# EAGLE board md (EAGLE 9.6.2)
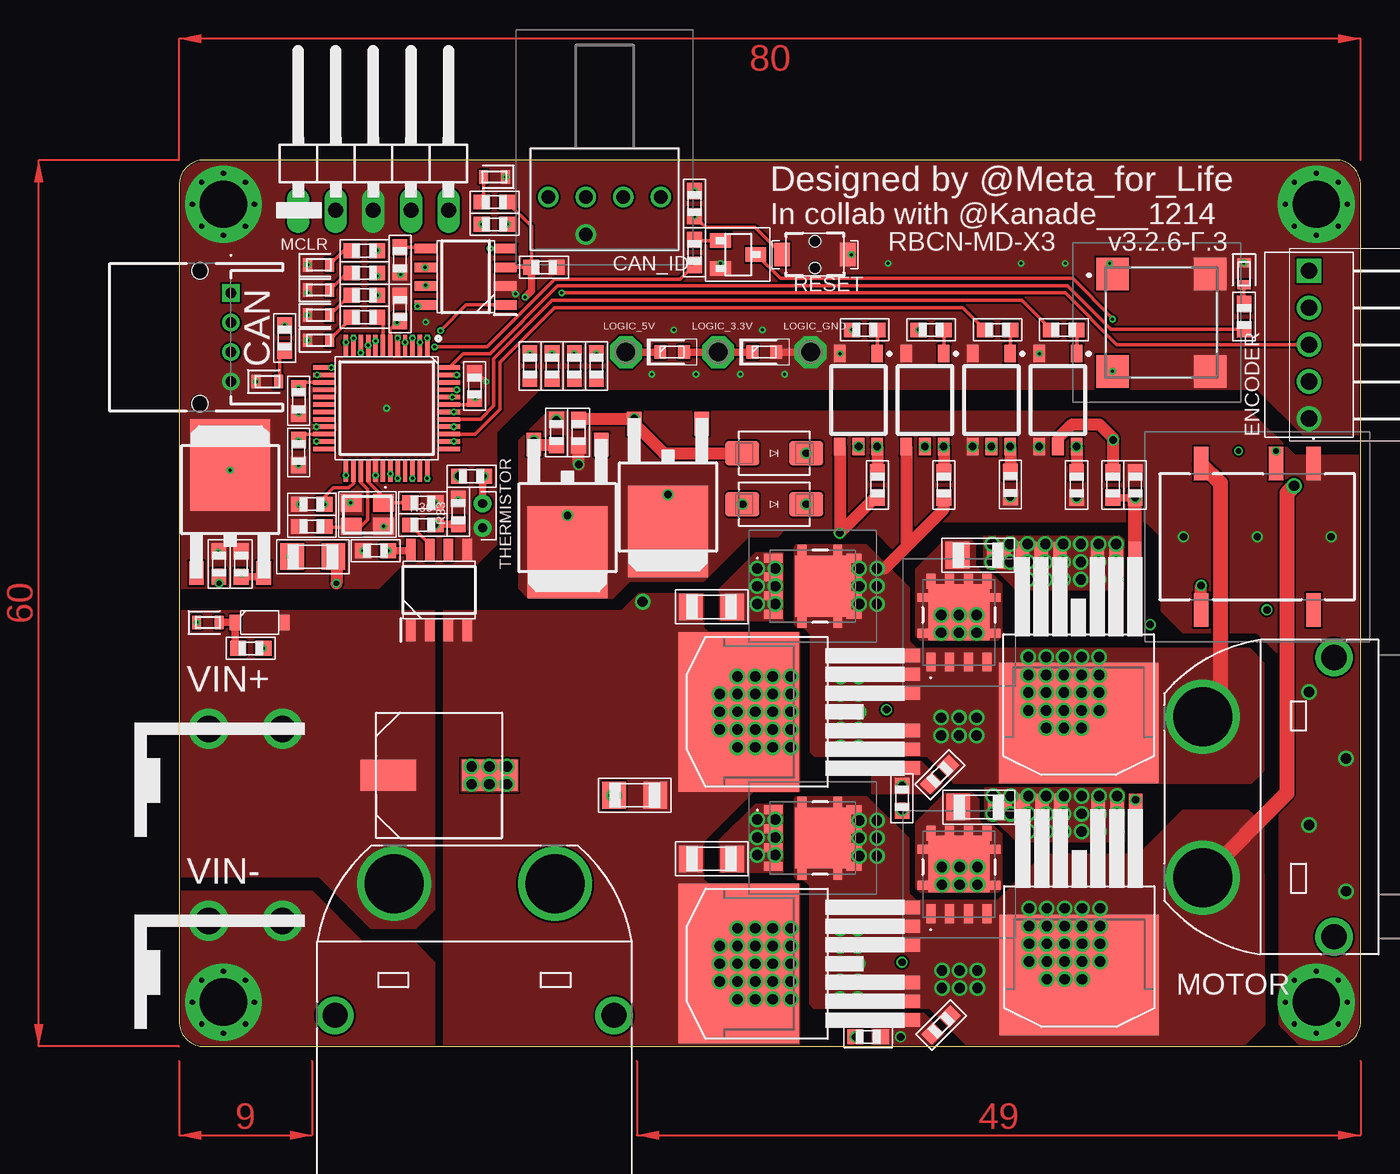
[diagram p0: board, top side]
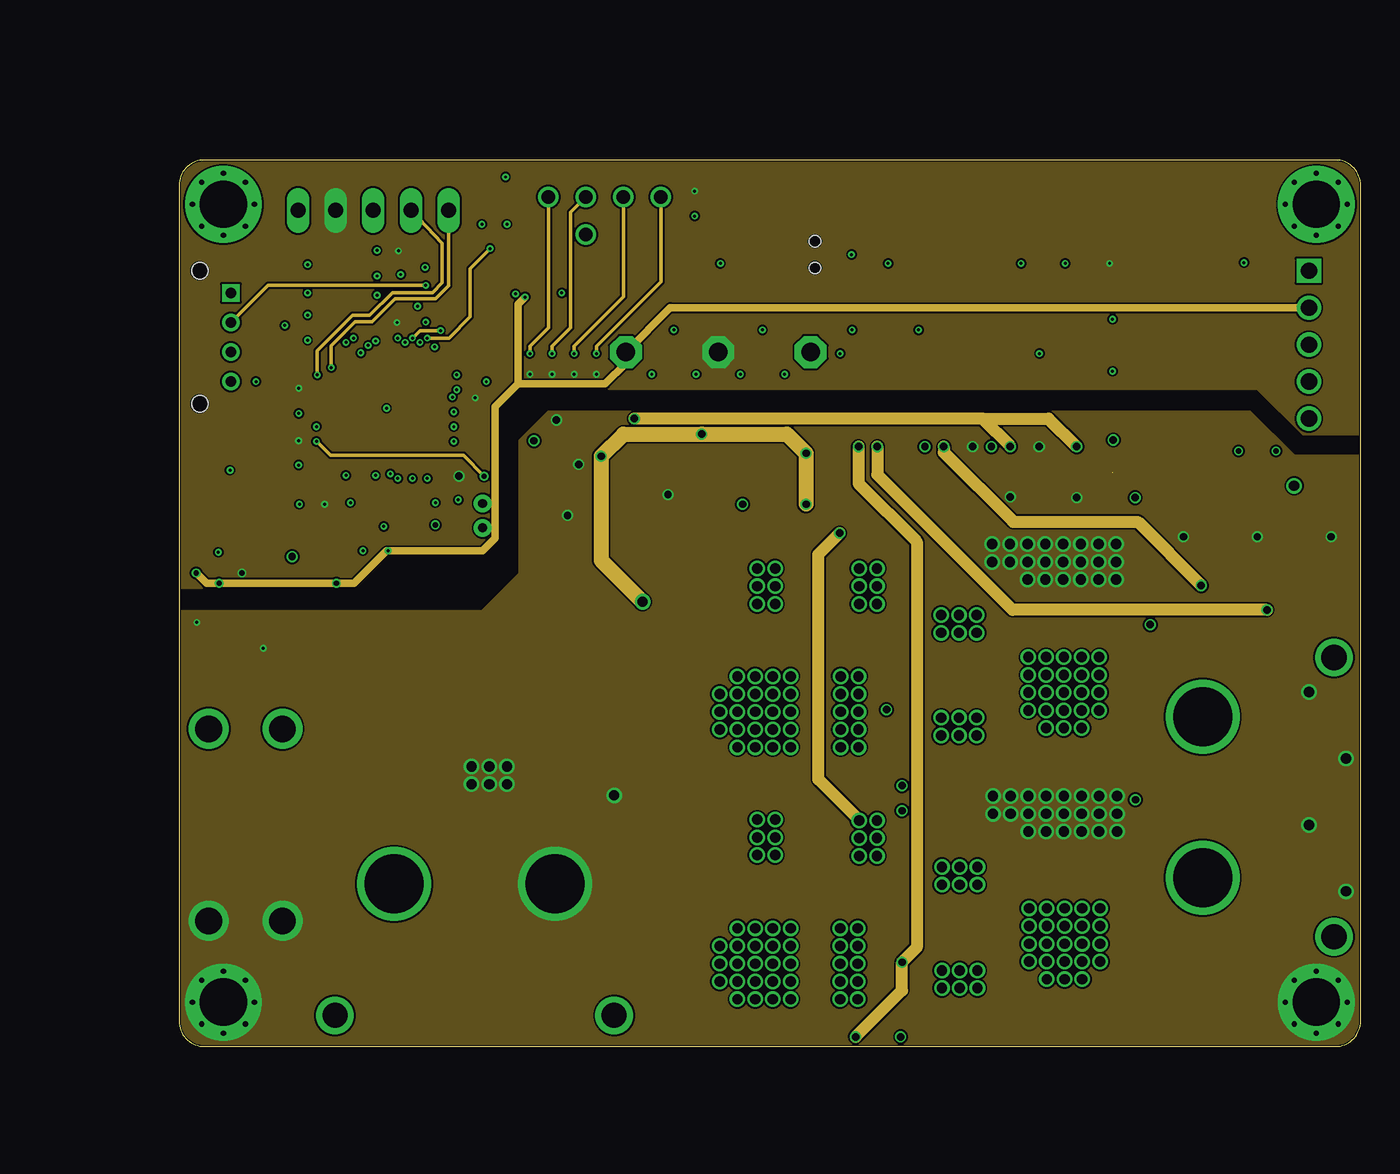
[diagram p1: board, inner layer Route2]
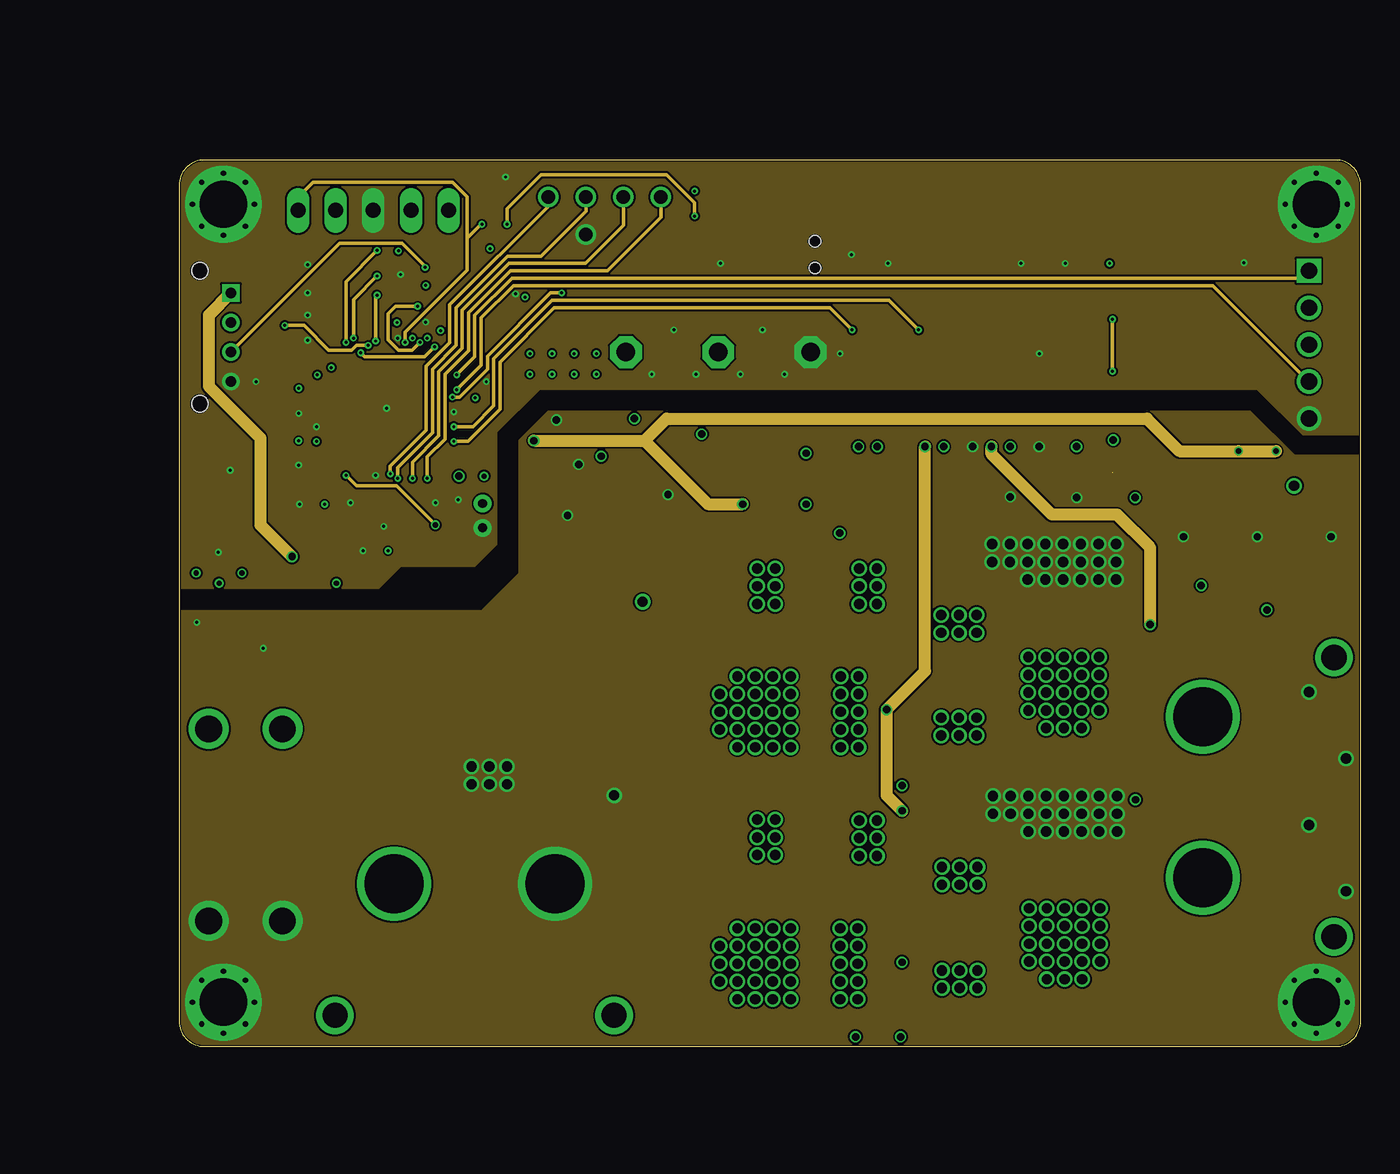
[diagram p2: board, inner layer Route15]
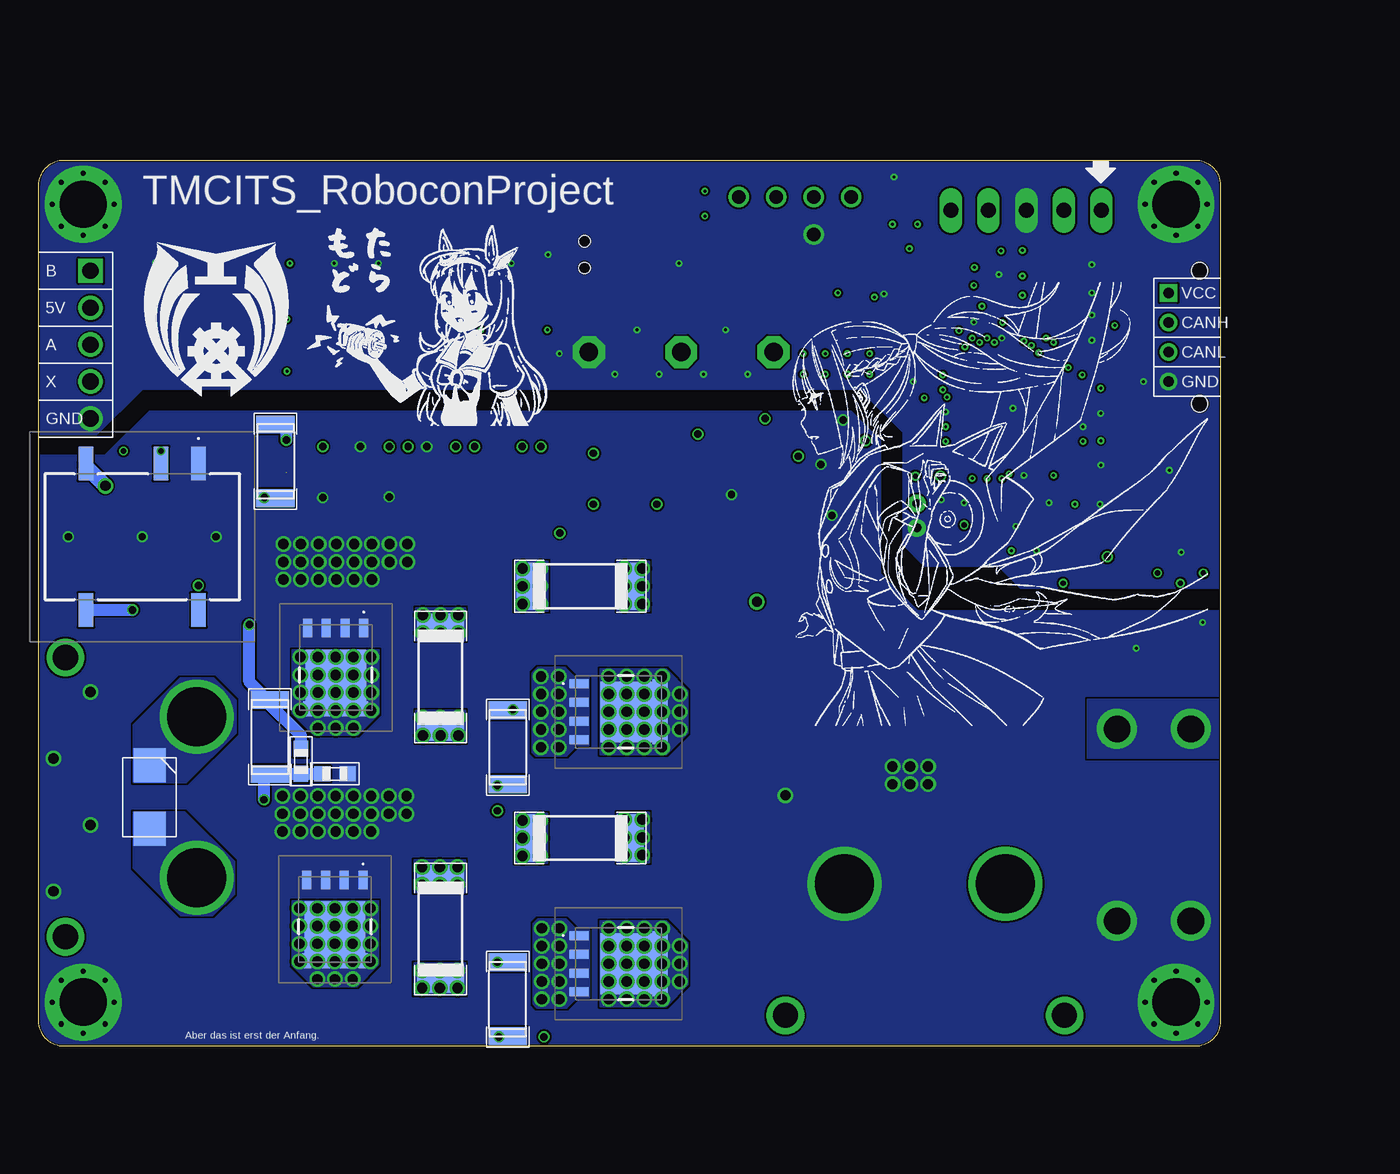
[diagram p3: board, bottom side, seen from below]

Size 80 x 60 mm. Coordinates in mm from the lower left corner, seen from the top.
Outline: 0,58.29 0,1.71 arc90 1.71,0 78.29,0 arc90 80,1.71 80,58.29 arc90 78.29,60 1.71,60 arc90 0,58.29
Copper layers (1*2*15*16): Top 0.035559375mm / dielectric 0.17018125mm / Route2 0.01778125mm / dielectric 47mil / Route15 0.01778125mm / dielectric 0.17018125mm / Bottom 0.035559375mm
Design rules "jlcpcb-4-layer *": minimum track width 5mil, minimum drill 0.2mm, track to track 5mil, track to pad 5mil, pad to pad 5mil, via to via 5mil, smd to smd 0mil, copper to edge 0.1mm, drill to drill 5mil, minimum pad ring 4mil, minimum via ring 0.125mm, stop-mask expansion 3mil, vias tented up to drill 100mil, thermal gap 10mil

## Footprints (pad centres in the part's own frame; a part is rotated, then mirrored left to right if it is on the bottom)
C3216 = smd 1.6 x 1.8: 1 -1.4,0; 2 1.4,0
C1608 = smd 1.1 x 1: 1 -0.85,0; 2 0.85,0
CAPAE830X1050N = smd 3.764 x 2.115: 1 -3.426,0; 2 3.426,0
XT90PW-F = drill 4: + -5.45,0; - 5.45,0 | drill 1.7: P$3 -9.45,8.9; P$4 9.45,8.9
XT90PW-M = drill 4: + -5.45,0; - 5.45,0 | drill 1.7: P$3 -9.45,8.9; P$4 9.45,8.9
DIOM5336X265N = smd 2.3 x 2.15: 1 -2.15,0; 2 2.15,0
LEDC1608X55N_FLAT-G = smd 0.612 x 0.912: A 0.75,0; C -0.75,0
SBRT20U100SLP13 = smd 0.61 x 1.27: 1 -1.905,-2.67; 2 -0.635,-2.67; 3 0.635,-2.67; 4 1.905,-2.67 | smd 0.61 x 0.71: 5 1.905,2.95; 6 0.635,2.95; 7 -0.635,2.95; 8 -1.905,2.95 | smd 4.1 x 3.81: 9 0,0.69 | smd 0.755 x 0.6: 10 -2.428,-0.735; 11 -2.428,1.69; 12 2.428,1.69; 13 2.428,-0.735 | smd 0.16 x 0.31: 14 2.13,2.44; 15 -2.13,2.44
LEDC1608X55N_FLAT-B = smd 0.612 x 0.912: A 0.75,0; C -0.75,0
LEDC1608X55N_FLAT-Y = smd 0.612 x 0.912: A 0.75,0; C -0.75,0
LEDC1608X55N_FLAT-R = smd 0.612 x 0.912: A 0.75,0; C -0.75,0
SMA = smd 2.28 x 1.66: A 2.165,0; C -2.165,0
DIOC1608X70N = smd 0.8 x 0.9: 1 -0.8,0; 2 0.8,0
SODFL3516X70N = smd 0.74 x 1.04: 1 -1.65,0; 2 1.65,0
11-4L1S(5-PIN-SOIC) = smd 0.8 x 1.2: 1 -1.27,-3.15; 3 1.27,-3.15; 4 1.27,3.15; 5 0,3.15; 6 -1.27,3.15
TO252 = smd 1 x 1.6: 1 -2.28,-4.8; 3 2.28,-4.8 | smd 5.4 x 6.2: 2 0,2.5
SOIC127P600X175-8N = smd 1.528 x 0.65: 1 -2.711,1.905; 2 -2.711,0.635; 3 -2.711,-0.635; 4 -2.711,-1.905; 5 2.711,-1.905; 6 2.711,-0.635; 7 2.711,0.635; 8 2.711,1.905
QFP50P900X900X120-48N = smd 1.475 x 0.3: 1 -4.238,2.75; 2 -4.238,2.25; 3 -4.238,1.75; 4 -4.238,1.25; 5 -4.238,0.75; 6 -4.238,0.25; 7 -4.238,-0.25; 8 -4.238,-0.75; 9 -4.238,-1.25; 10 -4.238,-1.75; 11 -4.238,-2.25; 12 -4.238,-2.75; 25 4.238,-2.75; 26 4.238,-2.25; 27 4.238,-1.75; 28 4.238,-1.25; 29 4.238,-0.75; 30 4.238,-0.25; 31 4.238,0.25; 32 4.238,0.75; 33 4.238,1.25; 34 4.238,1.75; 35 4.238,2.25; 36 4.238,2.75 | smd 0.3 x 1.475: 13 -2.75,-4.238; 14 -2.25,-4.238; 15 -1.75,-4.238; 16 -1.25,-4.238; 17 -0.75,-4.238; 18 -0.25,-4.238; 19 0.25,-4.238; 20 0.75,-4.238; 21 1.25,-4.238; 22 1.75,-4.238; 23 2.25,-4.238; 24 2.75,-4.238; 37 2.75,4.238; 38 2.25,4.238; 39 1.75,4.238; 40 1.25,4.238; 41 0.75,4.238; 42 0.25,4.238; 43 -0.25,4.238; 44 -0.75,4.238; 45 -1.25,4.238; 46 -1.75,4.238; 47 -2.25,4.238; 48 -2.75,4.238
SOIC127P600X175-8N' = smd 1.5 x 0.65: 1 -2.7,1.905; 2 -2.7,0.635; 3 -2.7,-0.635; 4 -2.7,-1.905; 5 2.7,-1.905; 6 2.7,-0.635; 7 2.7,0.635; 8 2.7,1.905
HDRRA5W64P0X250_1X5_1250X600X5 = drill 1.1 pad 1.65 square: 1 0,0 | drill 1.1 pad 1.65: 2 2.5,0; 3 5,0; 4 7.5,0; 5 10,0
S04BPASK2LFSN = drill 0.7 pad 1.2 square: 1 0,0 | drill 0.7 pad 1.2: 2 -2,0; 3 -4,0; 4 -6,0 | hole 1.1: 1.5,2.1; -7.5,2.1
1X05/90 = drill 1.016 long: 1 -5.08,-3.81; 2 -2.54,-3.81; 3 0,-3.81; 4 2.54,-3.81; 5 5.08,-3.81
FA238200000MBR = smd 1.4 x 1.2: 1 -1.1,-0.8; 2 1.1,-0.8; 3 1.1,0.8; 4 -1.1,0.8
P1-13 = drill 1.25 pad 2.159 octagon: TP 0,0
IES0105S12 = smd 1 x 2.29: 1 -3.81,-4.955; 2 -1.27,-4.955; 4 3.81,-4.955; 5 3.81,4.955; 8 -3.81,4.955
SC59 = smd 1 x 1.4: B -0.95,-1.2; C 0,1.2; E 0.95,-1.2
D2PAK-7 = smd 10.8 x 8.15: D 0,4.1 | smd 0.9 x 3.2: G -3.81,-6.56; S1 -2.54,-6.56; S2 -1.27,-6.56; S3 1.27,-6.56; S4 2.54,-6.56; S5 3.81,-6.56
C2512 = smd 1.8 x 3.2: 1 -3.4,0; 2 3.4,0
2010 = smd 1.2 x 2.6: P$1 -2.5,0; P$2 2.5,0
TVAF06A020BR = smd 1.05 x 1.6: 1 -2.225,0; 2 2.225,0 | hole 0.75: 0,0.9; 0,-0.9
DRR4016 = drill 0.9 pad 1.4: 1 0,0; 2 2.54,0; 3 5.08,0; 4 7.62,0; 5 2.54,-2.54
ＰＣＢ－５４Ｌ（Ｍ３） = drill 1.8: P$1 0,0; P$2 5,0
UGCT7525AN4 = smd 2.2 x 2.2: 1 -3.3,3.3; 2 -3.3,-3.3; 3 3.3,-3.3; 4 3.3,3.3

## Placement (x,y rotation side)
C1  0.01u  [C3216]  36.05,29.75 0 top
C2  0.01u  [C3216]  36.05,12.7 0 top
C3  0.01u  [C3216]  54.1,33.25 0 top
C4  0.01u  [C3216]  54.15,16.2 0 top
C5  0.1u  [C1608]  25.55,41.55 270 top
C6  0.1u  [C1608]  14.95,49.95 270 top
C7  0.1u  [C1608]  8.09,40.2 90 top
C8  0.1u  [C1608]  8.1,43.7 270 top
C9  0.1u  [C1608]  13.3,33.55 0 top
C10  0.1u  [C1608]  8.99,36.7 0 top
C11  0.1u  [C1608]  47.27,38 270 top
C12  0.1u  [C1608]  20,44.7 270 top
C13  330u  [CAPAE830X1050N]  17.6,18.35 0 top
C14  10u  [C1608]  2.7,32.65 90 top
C15  0.1u  [C1608]  4.2,32.65 90 top
C16  0.1u  [C1608]  60.77,38 270 top
C17  0.1u  [C1608]  48.95,16.8 90 top
C18  0.1u  [C1608]  63.23,38 270 top
C19  0.1u  [C1608]  62.25,19.3 90 bottom
C20  0.1u  [C1608]  46.65,0.65 180 top
C21  33p  [C1608]  16.5,36.8 0 top
C22  33p  [C1608]  8.99,35.2 180 top
C23  0.1u  [C1608]  56.27,38.03 270 top
C24  0.1u  [C1608]  51.77,38 270 top
C25  10u  [C3216]  30.85,17 180 top
C26  0.1u  [C1608]  14.95,53.25 90 top
C27  0.1u  [C1608]  24.7,52.73 180 top
C28  0.1u  [C1608]  27.05,41.55 90 top
CON1  XT90PW-F  [XT90PW-F]  69.3,16.88 270 top
CON2  XT90PW-M  [XT90PW-M]  20,11 180 top
D1  SMBJ45CA  [DIOM5336X265N]  72.5,16.88 270 bottom
D2  LED_GREEN  [LEDC1608X55N_FLAT-G]  9.45,49.5 0 top
D3  SBRT20U100SLP-13  [SBRT20U100SLP13]  52.8,28.7 0 top
D4  SBRT20U100SLP-13  [SBRT20U100SLP13]  52.8,11.65 0 top
D5  SBRT20U100SLP-13  [SBRT20U100SLP13]  42.9,14.1 270 top
D6  SBRT20U100SLP-13  [SBRT20U100SLP13]  42.9,31.15 270 top
D7  SBRT20U100SLP-13  [SBRT20U100SLP13]  40.75,22.65 270 bottom
D8  SBRT20U100SLP-13  [SBRT20U100SLP13]  40.75,5.6 270 bottom
D9  LED_BLUE  [LEDC1608X55N_FLAT-B]  9.45,47.8 0 top
D10  LED_GREEN  [LEDC1608X55N_FLAT-G]  72.1,52.3 270 top
D11  LED_YELLOW  [LEDC1608X55N_FLAT-Y]  9.45,51.2 0 top
D12  LED_GREEN  [LEDC1608X55N_FLAT-G]  5.97,45 0 top
D13  SBRT20U100SLP-13  [SBRT20U100SLP13]  59.9,25.65 180 bottom
D14  SBRT20U100SLP-13  [SBRT20U100SLP13]  59.95,8.6 180 bottom
D15  LED_RED  [LEDC1608X55N_FLAT-R]  9.45,52.9 0 top
D16  SS12  [SMA]  40.3,40.15 180 top
D17  SS12  [SMA]  40.3,36.7 180 top
D18  LED_YELLOW  [LEDC1608X55N_FLAT-Y]  1.95,28.7 0 top
D19  RB520SM-30T2R  [DIOC1608X70N]  33.38,47 0 top
D20  LED_BLUE  [LEDC1608X55N_FLAT-B]  21.35,58.85 180 top
D21  RB520SM-30T2R  [DIOC1608X70N]  39.62,47 0 top
D22  S-183T  [SODFL3516X70N]  5.45,28.7 0 top
IC1  TLP152  [11-4L1S(5-PIN-SOIC)]  59.5,43.75 180 top
IC2  TLP152  [11-4L1S(5-PIN-SOIC)]  46,43.75 180 top
IC3  TLP152  [11-4L1S(5-PIN-SOIC)]  55,43.75 180 top
IC4  NJM2845DL1  [TO252]  3.45,36.85 0 top
IC5  TMCS1107A1BQDRQ1  [SOIC127P600X175-8N]  17.6,30.9 90 top
IC6  PIC32MK0256MCJ048-I_Y8X  [QFP50P900X900X120-48N]  14.05,43.2 270 top
IC8  MCP2562-H_SN  [SOIC127P600X175-8N']  19.4,52.1 180 top
IC11  NJM2845DL1  [TO252]  26.3,35.95 180 top
IC12  NJM2845DL1  [TO252]  33.1,37.35 180 top
IC13  TLP152  [11-4L1S(5-PIN-SOIC)]  50.5,43.75 180 top
J1  BS5P-SHF-1AA_LF__SN_  [HDRRA5W64P0X250_1X5_1250X600X5]  76.5,52.5 270 top
J2  S04B-PASK-2_LF__SN_  [S04BPASK2LFSN]  3.5,51 90 top
JP1  WRITER  [1X05/90]  13.15,60.4 0 top
LGND  FA-238_20.0000MB-R  [FA238200000MBR]  12.75,36 180 top
LOGIC_3.3V  TPPAD1-13  [P1-13]  36.5,47 0 top
LOGIC_5V  TPPAD1-13  [P1-13]  30.25,47 0 top
LOGIC_GND  TPPAD1-13  [P1-13]  42.75,47 0 top
PS1  IES0105S12  [IES0105S12]  73,34.5 180 top
PS2  IES0105S12  [IES0105S12]  73,34.5 180 bottom
Q1  NPN  [SC59]  37.85,53.6 270 top
Q2  IRFS7730  [D2PAK-7]  60.9,26 180 top
Q3  IRFS7730  [D2PAK-7]  42,22.65 90 top
Q4  IRFS7730  [D2PAK-7]  42,5.6 90 top
Q12  IRFS7730  [D2PAK-7]  60.95,8.95 180 top
R1  100  [C2512]  52.8,25 270 bottom
R2  100  [C2512]  52.8,7.95 270 bottom
R3  100  [C2512]  43.35,14.1 0 bottom
R4  100  [C2512]  43.35,31.15 0 bottom
R5  220  [C1608]  46.42,48.5 0 top
R6  220  [C1608]  55.42,48.5 0 top
R7  220  [C1608]  59.9,48.5 0 top
R8  220  [C1608]  50.92,48.5 0 top
R9  10  [2010]  48.25,20.25 270 bottom
R10  1k  [C1608]  21.35,55.65 180 top
R11  10k  [C1608]  34.9,57.05 90 top
R12  10  [2010]  63.98,39.6 270 bottom
R13  10  [2010]  64.35,20.95 90 bottom
R14  220  [C1608]  7.15,47.95 90 top
R15  300  [C1608]  12.55,49.35 0 top
R16  500  [C1608]  12.55,50.85 0 top
R17  10  [2010]  48.25,3.2 90 bottom
R18  4.7k  [C1608]  28.25,46.05 270 top
R19  4.7k  [C1608]  26.75,46.05 270 top
R20  4.7k  [C1608]  25.25,46.05 270 top
R21  4.7k  [C1608]  23.75,46.05 270 top
R22  220  [C1608]  72.1,49.4 270 top
R23  220  [C1608]  12.55,53.85 0 top
R24  500  [C1608]  12.55,52.35 0 top
R25  RESETTABLE_FUSE  [C3216]  9.05,33.15 0 top
R26  5.2k  [C1608]  34.9,53.75 90 top
R27  10k  [C1608]  4.85,26.95 180 top
R28  300  [C1608]  21.35,57.15 0 top
R29  10k  [C1608]  59.95,18.45 180 bottom
R30  [C1608]  16.5,35.3 0 top
R31  10k  [C1608]  64.73,38 270 top
R32  10k  [C1608]  51.5,18.4 225 top
R33  [C1608]  18.9,36.2 90 top
R34  10k  [C1608]  51.6,1.45 225 top
R41  10k  [C1608]  19.8,38.6 180 top
S1  TVAF06-A020B-R  [TVAF06A020BR]  43.05,53.6 180 top
S2  DRR4016  [DRR4016]  25,57.5 0 top
SCREW1  KIBANNNEZI  [ＰＣＢ－５４Ｌ（Ｍ３）]  2,21.5 0 top
SCREW2  KIBANNNEZI  [ＰＣＢ－５４Ｌ（Ｍ３）]  2,8.5 0 top
U1  UGCT7525AN4  [UGCT7525AN4]  66.5,49 0 top
U$1  [LOGO]  68,49 0 bottom

## Library data of the parts
C1-C12 C14-C28 R1-R34 R41 = Robocon-RLC
C13 = Capacitor; CATEGORY: Capacitor
CON1 CON2 = amass
D1 = SMBJ45CA; DESCRIPTION: Diode TVS Single Bi-Dir 45V 600W 2-Pin SMB T/R; HEIGHT: 2.65mm; MANUFACTURER_NAME: LITTELFUSE; MANUFACTURER_PART_NUMBER: SMBJ45CA; MOUSER_PART_NUMBER: 576-SMBJ45CA; MOUSER_PRICE-STOCK: https://www.mouser.co.uk/ProductDetail/Littelfuse/SMBJ45CA?qs=zHiv0nsVGmogK0%252BNWlgMuw%3D%3D
D2 D10 D12 = LED; CATEGORY: LED; COLOR: GREEN; DESCRIPTION: CHIP LED FLAT; SUB-CATEGORY: CHIP; TYPE: FLAT_TOP
D3-D8 D13 D14 = SBRT20U100SLP-13; DESCRIPTION: Schottky Diodes & Rectifiers 20A Trench SBR 100V 20A 0.70Vf 0.3mA; HEIGHT: 1.1mm; MANUFACTURER_NAME: Diodes Inc.; MANUFACTURER_PART_NUMBER: SBRT20U100SLP-13; MOUSER_PART_NUMBER: 621-SBRT20U100SLP-13; MOUSER_PRICE-STOCK: https://www.mouser.co.uk/ProductDetail/Diodes-Incorporated/SBRT20U100SLP-13?qs=JtunSoW0QGFe6euRj6s4hQ%3D%3D
D9 D20 = LED; CATEGORY: LED; COLOR: BLUE; DESCRIPTION: CHIP LED FLAT; SUB-CATEGORY: CHIP; TYPE: FLAT_TOP
D11 D18 = LED; CATEGORY: LED; COLOR: YELLOW; DESCRIPTION: CHIP LED FLAT; SUB-CATEGORY: CHIP; TYPE: FLAT_TOP
D15 = LED; CATEGORY: LED; COLOR: RED; DESCRIPTION: CHIP LED FLAT; SUB-CATEGORY: CHIP; TYPE: FLAT_TOP
D16 D17 = Diodes; CREATED_BY: PCBLayout.com; DIGIKEY_PART_NUMBER: SS12FSCT-ND; MANUFACTURER: ON Semiconductor; MPN: SS12; PACKAGE: SMA (DO-214AC)
D19 D21 = RB520SM-30T2R; DESCRIPTION: ROHM RB520SM-30T2R, SMT Schottky Diode, 30V 200mA, 2-Pin SOD-523; HEIGHT: 0.7mm; MANUFACTURER_NAME: ROHM Semiconductor; MANUFACTURER_PART_NUMBER: RB520SM-30T2R; MOUSER_PART_NUMBER: 755-RB520SM-30T2R; MOUSER_PRICE-STOCK: https://www.mouser.co.uk/ProductDetail/ROHM-Semiconductor/RB520SM-30T2R?qs=QcFhgjUTvvrFOzD9weskVg%3D%3D
D22 = S-183T; DESCRIPTION: SEMITEC S-183T Constant Current Diode, 20mA, 4.6V max, 2-Pin SMD; HEIGHT: 0.7mm; MANUFACTURER_NAME: Semitec; MANUFACTURER_PART_NUMBER: S-183T; MOUSER_PART_NUMBER: 954-S-183T; MOUSER_PRICE-STOCK: https://www.mouser.co.uk/ProductDetail/Semitec/S-183T?qs=wgO0AD0o1vuZ97qIyUGqmw%3D%3D
IC1-IC3 IC13 = TLP152; DESCRIPTION: Toshiba TLP152 DC Input IC Output Optocoupler, Surface Mount, 5-Pin SOIC; HEIGHT: mm; MANUFACTURER_NAME: Toshiba; MANUFACTURER_PART_NUMBER: TLP152
IC4 IC11 IC12 = Robocon-Regulator
IC5 = Robocon-Sensor; DESCRIPTION: Board Mount Current Sensors AEC-Q100, +/-420-V isolated Hall-effect current sensor with internal reference 8-SOIC -40 to 125; HEIGHT: 1.75mm; MANUFACTURER_NAME: Texas Instruments; MANUFACTURER_PART_NUMBER: TMCS1107A1BQDRQ1; MOUSER_PART_NUMBER: 595-TMCS1107A1BQDRQ1; MOUSER_PRICE-STOCK: https://www.mouser.co.uk/ProductDetail/Texas-Instruments/TMCS1107A1BQDRQ1?qs=A6eO%252BMLsxmRDGOpu2d0NVw%3D%3D
IC6 = PIC32MK0256MCJ048-I_Y8X; DESCRIPTION: 32-bit Microcontrollers - MCU PIC32MK, 256K Flash, Motor Control Features, CAN-FD, 48 Pin TQFP; HEIGHT: 1.2mm; MANUFACTURER_NAME: Microchip; MANUFACTURER_PART_NUMBER: PIC32MK0256MCJ048-I/Y8X; MOUSER_PART_NUMBER: 579-0256MCJ048-I/Y8X; MOUSER_PRICE-STOCK: https://www.mouser.co.uk/ProductDetail/Microchip-Technology/PIC32MK0256MCJ048-I-Y8X?qs=vmHwEFxEFR8gYaXbO9BUkA%3D%3D
IC8 = MCP2562-H_SN; DESCRIPTION: CAN Interface IC CAN Tranceiver; HEIGHT: 1.75mm; MANUFACTURER_NAME: Microchip; MANUFACTURER_PART_NUMBER: MCP2562-H/SN; MOUSER_PART_NUMBER: 579-MCP2562-H/SN; MOUSER_PRICE-STOCK: https://www.mouser.co.uk/ProductDetail/Microchip-Technology-Atmel/MCP2562-H-SN?qs=eTPcRhULBzyBgcQwH2ol9w%3D%3D
J1 = BS5P-SHF-1AA_LF__SN_; DESCRIPTION: JST NH, 5 Way, 1 Row, Right Angle PCB Header; HEIGHT: 5.6mm; MANUFACTURER_NAME: JST (JAPAN SOLDERLESS TERMINALS); MANUFACTURER_PART_NUMBER: BS5P-SHF-1AA(LF)(SN); MOUSER_PART_NUMBER: N/A; MOUSER_PRICE-STOCK: https://www.mouser.co.uk/ProductDetail/JST/BS5P-SHF-1AALFSN/?qs=Cb2nCFKsA8o%252BiJBVSYMp9A%3D%3D
J2 = S04B-PASK-2_LF__SN_; ARROW_PART_NUMBER: S04B-PASK-2(LF)(SN); ARROW_PRICE-STOCK: https://www.arrow.com/en/products/s04b-pask-2-lf-sn/jst-manufacturing; DESCRIPTION: CONN HEADER R/A 4POS 2MM; HEIGHT: 6.5mm; MANUFACTURER_NAME: JST (JAPAN SOLDERLESS TERMINALS); MANUFACTURER_PART_NUMBER: S04B-PASK-2(LF)(SN)
JP1 LOGIC_3.3V LOGIC_5V LOGIC_GND = Robocon-Pin_Header
LGND = FA-238_20.0000MB-R; DESCRIPTION: Crystals 20MHz 50PPM -20C +70C 15pF; HEIGHT: 0.7mm; MANUFACTURER_NAME: Epson Timing; MANUFACTURER_PART_NUMBER: FA-238 20.0000MB-R; MOUSER_PART_NUMBER: 732-FA-23820B-R; MOUSER_PRICE-STOCK: https://www.mouser.co.uk/ProductDetail/Epson-Timing/FA-238-200000MB-R?qs=csoGsJbXmtBew1ok0N0Haw%3D%3D
PS1 PS2 = IES0105S12; DESCRIPTION: Isolated DC/DC Converters DC-DC, 1W, Unregulated, SMD; HEIGHT: 7.75mm; MANUFACTURER_NAME: XP POWER; MANUFACTURER_PART_NUMBER: IES0105S12; MOUSER_PART_NUMBER: 209-IES0105S12; MOUSER_PRICE-STOCK: https://www.mouser.co.uk/ProductDetail/XP-Power/IES0105S12?qs=Cb2nCFKsA8rFSc4uBRiKxQ%3D%3D
Q1 = Transistor; CATEGORY: Transistor; SUB-CATEGORY: BJT; TYPE: NPN
Q2-Q4 Q12 = Robocon-Transistor
S1 = TVAF06-A020B-R; DESCRIPTION: Vertical Flat Switch; HEIGHT: 2.2mm; MANUFACTURER_NAME: Zhejiang Jianfu Electronics Co., Ltd; MANUFACTURER_PART_NUMBER: TVAF06-A020B-R
S2 = DRR4016; DESCRIPTION: 16 Way Through Hole DIP Switch, Rotary Shaft Actuator; HEIGHT: 10.5mm; MANUFACTURER_NAME: KNITTER-SWITCH; MANUFACTURER_PART_NUMBER: DRR4016
SCREW1 SCREW2 = nezikibann
U1 = UGCT7525AN4; DESCRIPTION: SMD magnetic transducer; HEIGHT: 2mm; MANUFACTURER_NAME: Universal; MANUFACTURER_PART_NUMBER: UGCT7525AN4
U$1 = Robocon-Other

## Nets
A: IC6.44 J1.3
B: IC6.47 J1.1
BUZZ: IC6.10 R26.1
C1RX: IC6.1 IC8.4
C1TX: IC6.3 IC8.1
CAN_STBY: IC6.2 IC8.8
CURRENT: IC6.25 R30.2 R33.1
DEG: IC6.23 R41.1
H1GATE: C17.2 Q3.G R9.P$2 R32.2
H2GATE: C20.1 Q4.G R17.P$1 R34.2
HIGH1: C17.1 IC13.5 R9.P$1
HIGH2: C20.2 IC2.5 R17.P$2
HIGHSIDE1_+12V: C24.1 IC13.6 PS1.5
HIGHSIDE2_+12V: C11.1 IC2.6 PS2.5
HIGHSIDE_GATE_DCDC_SUPPLY_5V: C5.2 D17.A IC11.3 PS1.2 PS2.2
IN1: IC8.7 J2.2
IN2: IC8.6 J2.3
L1GATE: C18.2 Q2.G R12.P$2 R31.2
L2GATE: C19.1 Q12.G R13.P$1 R29.2
L3.3V: C6.2 C7.2 C8.1 C10.2 C12.2 C15.1 C26.2 D19.2 D21.1 IC4.3 IC6.6 IC6.15 IC6.22 IC6.26 IC6.43 IC8.5 JP1.2 LOGIC_3.3V.TP R11.2 R18.2 R19.2 R20.2 R21.2 R41.2 U1.1
L5V: C9.2 C14.1 C27.2 D19.1 IC4.1 IC5.8 IC8.3 J1.2 LOGIC_5V.TP R25.2 R28.2
LED_CAN: IC6.9 R14.2
LED_ENCODER: IC6.48 R22.2
LGND: C6.1 C7.1 C8.2 C9.1 C10.1 C12.1 C14.2 C15.2 C21.2 C22.2 C26.1 C27.1 D2.C D9.C D10.C D11.C D12.C D15.C D20.C D21.2 IC1.3 IC2.3 IC3.3 IC4.2 IC5.5 IC6.5 IC6.16 IC6.21 IC6.29 IC6.42 IC8.2 IC13.3 J1.5 J2.4 JP1.3 LGND.2 LGND.4 LOGIC_GND.TP Q1.E R33.2 S1.1 S2.5 U1.3 U1.4
LOAD1: C24.2 CON1.+ D1.1 D3.1 D3.2 D3.3 D3.4 D6.5 D6.6 D6.7 D6.8 D6.9 D6.10 D6.11 D6.12 D6.13 D6.14 D6.15 D7.1 D7.2 D7.3 D7.4 D13.5 D13.6 D13.7 D13.8 D13.9 D13.10 D13.11 D13.12 D13.13 D13.14 D13.15 IC13.4 PS1.4 Q2.D Q3.S1 Q3.S2 Q3.S3 Q3.S4 Q3.S5 R1.2 R4.1 R32.1
LOAD2: C11.2 CON1.- D1.2 D4.1 D4.2 D4.3 D4.4 D5.5 D5.6 D5.7 D5.8 D5.9 D5.10 D5.11 D5.12 D5.13 D5.14 D5.15 D8.1 D8.2 D8.3 D8.4 D14.5 D14.6 D14.7 D14.8 D14.9 D14.10 D14.11 D14.12 D14.13 D14.14 D14.15 IC2.4 PS2.4 Q4.S1 Q4.S2 Q4.S3 Q4.S4 Q4.S5 Q12.D R2.2 R3.1 R34.1
LOW1: C18.1 IC1.5 R12.P$1
LOW2: C19.2 IC3.5 R13.P$2
LOWSIDE_GATE_SUPPLY_12V: C16.1 C23.1 C28.2 D16.A IC1.6 IC3.6 IC12.3
MCLR: IC6.4 JP1.1 R10.2
N$1: D10.A R22.1
N$2: C13.1 CON2.- D22.2 IC5.1 IC5.2 SCREW1.P$1 SCREW1.P$2
N$3: C2.2 D5.1 D5.2 D5.3 D5.4 R3.2
N$4: IC3.1 R6.2
N$5: R10.1 R11.1 S1.2
N$6: IC6.7 R15.2
N$7: C3.1 D3.5 D3.6 D3.7 D3.8 D3.9 D3.10 D3.11 D3.12 D3.13 D3.14 D3.15 R1.1
N$8: C4.1 D4.5 D4.6 D4.7 D4.8 D4.9 D4.10 D4.11 D4.12 D4.13 D4.14 D4.15 R2.1
N$9: C1.2 D6.1 D6.2 D6.3 D6.4 R4.2
N$10: IC6.8 R16.2
N$11: D9.A R15.1
N$12: D2.A R16.1
N$13: IC6.11 R24.2
N$14: IC2.1 R5.2
N$15: IC6.12 R23.2
N$16: D11.A R24.1
N$17: D15.A R23.1
N$18: J2.1 R25.1
N$19: D12.A R14.1
N$20: D18.A D22.1 R27.2
N$21: D20.A R28.1
N$22: IC5.7 R30.1
N$25: Q1.C U1.2
N$26: Q1.B R26.2
N$28: IC1.1 R7.2
N$29: IC13.1 R8.2
OSCI: C22.1 IC6.27 LGND.3
OSCO: C21.1 IC6.28 LGND.1
PGEC: IC6.13 JP1.5
PGED: IC6.14 JP1.4
PGND: C3.2 C4.2 C5.1 C13.2 C16.2 C23.2 C25.2 C28.1 CON2.+ D13.1 D13.2 D13.3 D13.4 D14.1 D14.2 D14.3 D14.4 D18.C IC1.4 IC3.4 IC11.2 IC12.2 PS1.1 PS2.1 Q2.S1 Q2.S2 Q2.S3 Q2.S4 Q2.S5 Q12.S1 Q12.S2 Q12.S3 Q12.S4 Q12.S5 R27.1 R29.1 R31.1 SCREW2.P$1 SCREW2.P$2
PWM1_HIGH: IC6.40 R8.1
PWM1_LOW: IC6.41 R7.1
PWM2_HIGH: IC6.38 R5.1
PWM2_LOW: IC6.39 R6.1
ROTA1: IC6.31 R21.1 S2.1
ROTA2: IC6.32 R20.1 S2.2
ROTA4: IC6.34 R19.1 S2.3
ROTA8: IC6.36 R18.1 S2.4
VDD: C1.1 C2.1 C25.1 D7.5 D7.6 D7.7 D7.8 D7.9 D7.10 D7.11 D7.12 D7.13 D7.14 D7.15 D8.5 D8.6 D8.7 D8.8 D8.9 D8.10 D8.11 D8.12 D8.13 D8.14 D8.15 D16.C D17.C IC5.3 IC5.4 IC11.1 IC12.1 Q3.D Q4.D
X: IC6.45 J1.4

## Tracks (layer width: path | path; a pad name or v marks a point on that pad's centre or on a via)
A  (via drill 0.2)
  Top 0.152: IC6.44 v18.5,43.95
  Top 0.25: v25.9,51 60,51 63.5,47.5 J1.3
  Route15 0.25: v18.5,43.95 19,43.95 20.87,45.82 20.87,46.73 25.14,51 v25.9,51
B  (via drill 0.2)
  Top 0.25: IC6.47 v18.8,45.45
  Route15 0.25: v18.8,45.45 20.02,46.67 20.02,49.48 22.54,52 76,52 J1.1
BUZZ  (via drill 0.2)
  Top 0.25: IC6.10 v12.3,46.95 | v17.3,47.35 20.85,47.35 25.43,51.93 33.93,51.93 R26.1
  Route15 0.25: v12.3,46.95 12.57,46.67 16.62,46.67 v17.3,47.35
C1RX  (via drill 0.2)
  Top 0.25: IC6.1 v16.8,47.95 | v21.05,54 IC8.4
  Route2 0.25: v16.8,47.95 18.28,47.95 19.7,49.37 19.7,52.65 v21.05,54
C1TX  (via drill 0.2)
  Top 0.25: IC6.3 v15.8,47.95 | IC8.1 19.45,50.19 v17.7,48.45
  Route2 0.25: v17.7,48.45 16.3,48.45 v15.8,47.95
CAN_STBY  (via drill 0.2)
  Top 0.25: IC8.8 16.61,50.1 v16.15,50.1 | IC6.2 v16.3,47.65
  Route15 0.25: v16.3,47.65 15.78,47.12 14.88,47.12 14.15,47.85 14.15,49.6 14.65,50.1 v16.15,50.1
CURRENT  (via drill 0.2, 0.35)
  Top 0.25: IC6.25 v11.3,38.65
  Top 0.5: R30.2 17.4,35.35 R33.1
  Route15 0.25: R30.2 17.35,35.32 14.72,37.95 12,37.95 v11.3,38.65
  other vias: 17.35,35.3
DEG  (via drill 0.2, 0.35, 0.6 pad 1.2)
  Top 0.25: IC6.23 v9.3,40.95
  Top 0.5: R41.1 20.55,38.5 v20.55,36.75
  Route2 0.25: v9.3,40.95 10.25,40 19.25,40 R41.1
  other vias: 20.65,38.6
H1GATE  (via drill 0.5)
  Bottom 0.25: R9.P$2 48.85,17.75 C17.2
  other vias: 48.95,17.65
  pour Top (no thermals): 46.9,19.3 46.9,17.1 50.95,17.1 51.67,17.83 50.2,19.3
H2GATE  (via drill 0.5)
  Bottom 0.25: R17.P$1 48.8,0.7 v48.85,0.65
  pour Top (no thermals): 46.9,2.25 46.9,0.05 50.95,0.05 51.77,0.88 50.4,2.25
HIGH1  (via drill 0.5)
  Route15 0.8: C17.1 47.9,17 v47.9,22.8 50.5,25.4 IC13.5
  Bottom 0.5: R9.P$1 47.95,22.75 v47.9,22.8
  other vias: 48.95,15.95 50.5,40.6
HIGH2  (via drill 0.5)
  Route2 0.8: IC2.5 46,38.1 49.95,34.15 49.95,6.7 v48.95,5.7 48.95,3.8 C20.2
  Bottom 0.25: R17.P$2 v48.95,5.7
  other vias: 45.8,0.65 46,40.6
HIGHSIDE1_+12V  (via drill 0.5)
  Top 0.8: IC13.6 C24.1 | PS1.5 v69.19,31.19 v69.2,31.2
  Route2 0.8: IC13.6 51.77,40.2 56.47,35.5 64.9,35.5 v69.2,31.2
  other vias: 51.77,40.6
HIGHSIDE2_+12V  (via drill 0.5)
  Top 0.8: IC2.6 C11.1
  Route2 0.8: IC2.6 47.27,38.7 56.42,29.55 v73.65,29.55
  Bottom 0.8: PS2.5 v73.66,29.55 v73.65,29.55
  other vias: 47.27,40.6
HIGHSIDE_GATE_DCDC_SUPPLY_5V  (via drill 0.35, 0.5)
  Top 0.25: PS1.2 v74.27,40.3
  Top 0.5: D17.A v38.15,36.7
  Top 0.8: v24.02,41 IC11.3 24.06,40.7 C5.2
  Route15 0.8: v74.27,40.3 v71.73,40.3 67.73,40.3 65.53,42.5 33,42.5 31.5,41 | v24.02,41 31.5,41 | 31.5,41 35.8,36.7 v38.15,36.7
  Bottom 0.25: PS2.2 v71.73,40.3
IN1  (via drill 0.2)
  Top 0.25: IC8.7 v16.7,51.52
  Route2 0.25: J2.2 6.01,51.52 v16.7,51.52
IN2  (via drill 0.2)
  Top 0.25: IC8.6 v16.65,52.73
  Route15 0.25: J2.3 10.86,54.36 15.1,54.36 16.65,52.81 v16.65,52.73
L1GATE  (via drill 0.5)
  Top 0.5: C18.2 R31.2
  Top 0.9: Q2.G 64.71,37.13 R31.2
  Bottom 0.5: R12.P$2 64.66,37.1 R31.2
  other vias: 64.73,37.15
L2GATE  (via drill 0.5)
  Top 0.25: Q12.G v64.76,16.69 v64.75,16.7
  Bottom 0.8: v64.75,16.7 64.75,18.05 R13.P$1 C19.1 R29.2
L3.3V  (via drill 0.2, 0.35, 0.5)
  Top 0.25: 8.49,44.95 C8.1 8.5,44.95 IC6.15 | 14.3,47.8 IC6.6 14.3,48.55 v14.75,49 14.82,49 C6.2 | IC6.43 19.6,43.45 C12.2 v20.05,43.9 | IC8.5 16.6,54.11 C26.2 14.95,53.95 v14.85,53.85 | IC6.26 11.8,38.13 11.47,37.8 10.44,37.8 9.84,37.2 C10.2 v9.85,36.7 | C15.1 4.2,32 v4.25,32.05 | R18.2 v28.25,45.5 | v26.75,45.5 R19.2 | R21.2 v23.75,45.5 | IC6.22 8.49,41.45 C7.2 v8.09,41
  Top 0.5: C15.1 5.48,31.8 IC4.3 | v25.25,45.5 R20.2 | U1.1 63.2,52.8 v63,53 | D21.1 LOGIC_3.3V.TP D19.2
  other vias: 8.1,44.55 18.95,38.6 34.9,57.9
  pour Route2 (rank 6, no thermals): -1.5,31 13.5,31 15,32.5 20,32.5 21.5,34 21.5,41.6 24.4,44.5 73,44.5 76.1,41.4 81.5,41.4 81.5,61.5 -1.5,61.5
L5V  (via drill 0.2, 0.35)
  Top 0.25: IC8.3 C27.2 23.85,55.5 R28.2
  Top 0.5: C14.1 v2.7,31.35 | IC4.1 v1.15,32.05 | C27.2 23.85,51.15 v23.43,50.72 | LOGIC_5V.TP D19.1 | IC5.8 15.63,33.55 C9.2
  Top 0.8: R25.2 10.65,32.95 v10.65,31.35
  Route2 0.5: v1.15,32.05 1.85,31.35 v2.7,31.35 v10.65,31.35 11.85,31.35 14.05,33.55 C9.2 20.55,33.55 21.4,34.4 21.4,43.3 22.95,44.85 | v23.43,50.72 22.95,50.25 22.95,44.85 | 22.95,44.85 28.85,44.85 30.25,46.25 LOGIC_5V.TP 33.25,50 J1.2
  other vias: 14.15,33.55
LED_CAN  (via drill 0.2)
  Top 0.25: IC6.9 v12.8,47.45
  Route15 0.25: R14.2 8.45,48.8 10.12,47.12 11.68,47.12 12,47.45 v12.8,47.45
  other vias: 7.15,48.8
LED_ENCODER
  Top 0.25: IC6.48 19.24,46.9 21.04,46.9 25.64,51.5 60.15,51.5 63.1,48.55 R22.2
LGND  (via drill 0.2, 0.35, 0.6 pad 1.2, 3.2 pad 5.2)
  Top 0.25: v20.8,45 20.25,45.55 C12.1 | IC6.5 v14.8,47.95 | v22.77,50.94 22.25,51.47 IC8.2 | Q1.E v36.65,53
  Top 0.5: D21.2 LOGIC_GND.TP
  other vias: 11.6,36.8 17.35,36.8 8.1,42.85 13.3,38.65 9.3,41.95 20.55,35.1 18.6,42.95 16.7,49.03 8.09,39.35 5.2,45 8.7,49.5 8.7,47.8 2.65,33.45 8.15,36.7 8.7,52.92 8.7,51 77,57 74.9,57 75.52,55.52 77,54.9 78.48,55.52 79.1,57 78.48,58.48 77,59.1 75.52,58.48 3,57 0.9,57 1.52,55.52 3,54.9 4.48,55.52 5.1,57 4.48,58.48 3,59.1 1.52,58.48 15,52.25 45.52,53.6 12.45,33.55 3.45,39 18.9,37 72.1,53.05 14.05,43.2 32,45.5 33.5,48.5 35,45.5 38,45.5 39.5,48.5 41,45.5 48,53 57,53 60,53 22.1,58.85 13.85,35.2 44.75,46.9 58.25,46.9
  pour Bottom (rank 6, no thermals): -0.5,60.5 -0.5,31 13.5,31 15,32.5 20,32.5 21.5,34 21.5,41.6 24.4,44.5 73,44.5 76.1,41.4 80.5,41.4 80.5,60.5
  pour Top (rank 6, no thermals): -2,31 13.5,31 15,32.5 20,32.5 21.5,34 21.5,41.6 24.4,44.5 73,44.5 76.1,41.4 82,41.4 82,62 -2,62
  pour Route15 (rank 6, no thermals): -1,61 -1,31 13.5,31 15,32.5 20,32.5 21.5,34 21.5,41.6 24.4,44.5 73,44.5 76.1,41.4 81,41.4 81,61
LOAD1  (via drill 0.7)
  Top 0.8: IC13.4 49.23,33.83 | 49.23,33.83 47.75,32.35 v47.25,32.35 | 49.23,33.83 51.77,36.38 C24.2
  Top 1: PS1.4 70.5,38.14 70.5,23.53 CON1.+
  other vias: 51.6,22.25 52.8,22.25 54,22.25 54,21.05 52.8,21.05 51.6,21.05 57.5,26.35 58.7,26.35 59.9,26.35 61.1,26.35 62.3,26.35 62.3,25.15 61.1,25.15 59.9,25.15 58.7,25.15 57.5,25.15 57.5,23.95 58.7,23.95 59.9,23.95 61.1,23.95 62.3,23.95 62.3,22.75 61.1,22.75 59.9,22.75 58.7,22.75 57.5,22.75 44.8,20.25 44.8,21.45 44.8,22.65 46,22.65 46,21.45 46,20.25 44.8,25.05 44.8,23.85 46,23.85 46,25.05 46.05,29.95 46.05,31.15 46.05,32.35 47.25,31.15 47.25,29.95 58.7,21.55 59.9,21.55 61.1,21.55
  pour Top (no thermals): 42.75,25.45 42.75,19.95 43.05,19.65 50.65,19.65 52.5,17.8 72.55,17.8 73.45,18.7 73.45,25.95 72.45,26.95 44.25,26.95
  pour Bottom (no thermals): 51.1,22.75 51.1,20.55 54.5,20.55 54.5,22.75
  pour Bottom (no thermals): 56.95,26.85 56.95,22.55 58.45,21.05 61.35,21.05 62.85,22.55 62.85,26.85
  pour Bottom (no thermals): 42.75,24.95 42.75,20.35 43.6,20.35 44.3,19.65 46.35,19.65 46.6,19.9 46.6,25.25 46.2,25.65 44.4,25.65 43.7,24.95
  pour Top (no thermals): 51.4,25.45 49.45,27.4 49.45,31 46.5,33.95 41.8,33.95 41.65,33.8 41.65,28.6 41.9,28.35 42.35,28.35 42.75,27.95 42.75,25.45
  pour Bottom (no thermals): 73.6,17.85 70.05,17.85 66.65,21.25 66.65,23.4 68.2,24.95 70.4,24.95 73.6,21.75
  pour Bottom (no thermals): 45.55,32.85 45.55,29.45 47.75,29.45 47.75,32.85
LOAD2  (via drill 0.5, 0.7)
  Top 0.8: v44.73,34.75 IC2.4 | v44.73,34.75 44.73,34.85 | v44.73,34.75 47.12,37.15 C11.2
  Top 1: CON1.- 75,17.12 75,37.45 v75.5,37.95
  Route2 0.8: v46.05,15.3 43.27,18.08 43.27,33.3 v44.73,34.75
  Bottom 1: PS2.4 76.81,39.26 v75.5,37.95
  other vias: 51.65,5.15 52.85,5.15 54.05,5.15 54.05,3.95 52.85,3.95 51.65,3.95 57.55,9.35 58.75,9.35 59.95,9.35 61.15,9.35 62.35,9.35 62.35,8.15 61.15,8.15 59.95,8.15 58.75,8.15 57.55,8.15 57.55,6.95 58.75,6.95 59.95,6.95 61.15,6.95 62.35,6.95 62.35,5.75 61.15,5.75 59.95,5.75 58.75,5.75 57.55,5.75 44.75,3.2 45.95,3.2 44.75,4.4 45.95,4.4 45.95,5.6 44.75,5.6 44.75,6.8 44.75,8 45.95,8 45.95,6.8 46.05,12.9 46.05,14.1 47.25,15.3 47.25,14.1 47.25,12.9 58.75,4.55 59.95,4.55 61.15,4.55
  pour Top (no thermals): 55.45,9.9 44.2,9.9 42.7,8.4 42.7,2.9 43,2.6 50.85,2.6 55.45,-2 70.01,-2 73.5,1.5 73.43,15.02 72.37,16 67.97,16 66,14 65,13 58.55,13
  pour Bottom (no thermals): 51.1,5.65 51.1,3.45 54.6,3.45 54.6,5.65
  pour Bottom (no thermals): 42.7,7.9 42.7,3.3 43.6,3.3 44.3,2.6 46.25,2.6 46.55,2.9 46.55,8.3 46.2,8.65 44.35,8.65 43.6,7.9
  pour Bottom (no thermals): 57,9.85 57,5.55 58.5,4.05 61.4,4.05 62.85,5.5 62.85,9.85
  pour Top (no thermals): 51.35,8.4 49.4,10.35 49.4,14.05 46.55,16.9 41.8,16.9 41.65,16.75 41.65,11.5 41.85,11.3 42.3,11.3 42.7,10.9 42.7,8.4
  pour Bottom (no thermals): 73.6,15.9 70.15,15.9 66.75,12.5 66.75,10.35 68.25,8.85 70.35,8.85 73.6,12.1
  pour Bottom (no thermals): 45.55,15.8 45.55,12.4 47.75,12.4 47.75,15.8
LOW1  (via drill 0.5)  (1 unrouted)
  Top 0.8: IC1.5 59.5,41.15 60.45,42.1 62.3,42.1 63.25,41.15 v63.25,41.05 63.25,38.85 63.23,38.83
  Bottom 0.8: R12.P$1 63.88,42 63.5,42 63.25,41.75 v63.25,41.05
LOW2  (via drill 0.5)
  Top 0.25: IC3.5
  Route15 0.8: IC3.5 55,40.1 59.09,36 63.5,36 65.75,33.75 v65.75,28.55
  Bottom 0.8: v65.75,28.55 65.75,24.7 64.5,23.45 R13.P$2 64.4,23.5 64.7,23.5 62.25,21.05 C19.2
  other vias: 55,40.6
LOWSIDE_GATE_SUPPLY_12V  (via drill 0.5)
  Top 0.25: IC12.3 v30.82,42.5
  Top 0.8: IC1.6 C16.1 | IC3.6 C23.1 | IC12.3 32.82,40.15 D16.A | C28.2 27.15,42.5 v30.82,42.5
  Route2 0.8: IC3.6 56.27,40.62 54.4,42.5 | 54.4,42.5 v30.82,42.5 | 54.4,42.5 58.87,42.5 IC1.6
  other vias: 60.77,40.6 56.27,40.6
MCLR  (via drill 0.2)
  Top 0.25: v15.3,47.65 IC6.4
  Route15 0.25: 19.5,54.7 19.5,52.55 15.3,48.35 v15.3,47.65 | JP1.1 8.07,57.49 9.08,58.5 18.5,58.5 19.5,57.5 19.5,54.7 | R10.2 20.45,55.65 19.5,54.7
  other vias: 20.5,55.65
N$1
  Top 0.25: 72.1,50.42 R22.1 D10.A
N$2
  pour Top (rank 6, no thermals): -2,29.5 17.3,29.5 17.3,9.3 16,8 13,8 9.5,11.5 -2,11.5
  pour Bottom (no thermals): -2.5,23.5 -2.5,19.5 9,19.5 9,23.5
N$3  (via drill 0.7)
  other vias: 39.15,12.95 39.15,14.15 39.15,15.35 40.35,15.35 40.35,14.15 40.35,12.95
  pour Top (no thermals): 36.6,13.95 36.6,11.8 40.9,11.8 40.9,16.4 39.05,16.4
  pour Bottom (no thermals): 38.65,15.85 38.65,12.45 40.85,12.45 40.85,15.85
N$4
  Top 0.25: R6.2 IC3.1
N$5  (via drill 0.2)
  Top 0.25: S1.2 40.83,53.62 39,55.45 35.65,55.45 R11.1
  Route15 0.25: R11.1 34.9,57.1 33,59 24.5,59 22.2,56.7 R10.1
  other vias: 22.2,55.65 34.9,56.2
N$6
  Top 0.25: R15.2 13.8,48.95 IC6.7
N$7  (via drill 0.7)
  other vias: 51.6,29.2 52.8,29.2 54,29.2 54,28 52.8,28 51.6,28
  pour Top (no thermals): 51.85,34.25 53.6,34.25 53.9,33.95 53.9,32.5 54.4,32 55,32 55.7,31.3 55.7,27.8 55.4,27.5 50.2,27.5 49.9,27.8 49.9,32.3
  pour Bottom (no thermals): 51.1,29.7 51.1,27.45 54.5,27.45 54.5,29.7
N$8  (via drill 0.7)
  other vias: 51.65,12.15 52.85,12.15 54.05,12.15 54.05,10.95 52.85,10.95 51.65,10.95
  pour Top (no thermals): 51.9,17.15 53.7,17.15 54.15,16.7 54.15,15.3 54.5,14.95 55.1,14.95 55.7,14.35 55.7,10.75 55.4,10.45 50.2,10.45 49.9,10.75 49.9,15.15
  pour Bottom (no thermals): 51.1,12.65 51.1,10.4 54.6,10.4 54.6,12.65
N$9  (via drill 0.7)
  other vias: 39.15,29.95 39.15,31.15 39.15,32.35 40.35,32.35 40.35,31.15 40.35,29.95
  pour Top (no thermals): 36.6,30.95 36.6,28.8 40.9,28.8 40.9,33.4 39.05,33.4
  pour Bottom (no thermals): 38.65,32.85 38.65,29.45 40.85,29.45 40.85,32.85
N$10  (via drill 0.2)
  Top 0.25: IC6.8 v13.3,47.75
  Route15 0.25: v13.3,47.75 13.3,50.75 R16.2
  other vias: 13.4,50.85
N$11
  Top 0.25: R15.1 10.2,47.85 D9.A
N$12
  Top 0.25: D2.A 11.54,50.84 R16.1
N$13  (via drill 0.2)
  Top 0.25: IC6.11 v11.8,47.95 | R24.2 v13.4,52.15
  Route15 0.25: v13.4,52.15 11.8,50.55 v11.8,47.95
N$14
  Top 0.25: IC2.1 R5.2
N$15  (via drill 0.2)
  Top 0.25: IC6.12 v11.3,47.65 | R23.2 v13.4,53.88
  Route15 0.25: v11.3,47.65 11.3,51.75 v13.4,53.88
N$16
  Top 0.25: D11.A 11.33,52.33 R24.1
N$17
  Top 0.25: D15.A 11.15,53.85 R23.1
N$18  (via drill 0.5)
  Route15 0.8: J2.1 2,49.5 2,44.7 5.5,41.2 5.5,35.3 R25.1
  other vias: 7.65,33.15
N$19
  Top 0.25: D12.A 6.8,45.08 6.8,46.75 R14.1
N$20
  Top 0.5: R27.2 3.8,27.15 D22.1 D18.A
N$21
  Top 0.25: D20.A 20.6,57.25 R28.1
N$22
  Top 0.25: R30.1 16.99,33.96 16.99,33.63 IC5.7
N$25  (via drill 0.2)
  Top 0.25: Q1.C 39.1,53.6 40.7,52 60.5,52 63.2,49.3 v63.2,49.22
  Route15 0.25: v63.2,49.22 U1.2
  other vias: 63.2,45.7
N$26
  Top 0.25: Q1.B 34.95,54.55 R26.2
N$28
  Top 0.25: R7.2 60.77,48.48 IC1.1
N$29
  Top 0.25: IC13.1 R8.2
OSCI
  Top 0.25: 11.65,35.35 LGND.3 11.6,35.15 | C22.1 9.91,35.15 11.6,35.15 | 11.6,35.15 12.25,35.15 12.75,35.65 12.75,37.72 12.3,38.17 IC6.27
OSCO
  Top 0.25: C21.1 LGND.1 13.85,37.16 12.8,38.21 IC6.28
PGEC  (via drill 0.2)
  Top 0.25: IC6.13 v10.3,45.95 10.35,45.95
  Route2 0.25: v10.3,45.95 10.3,47.43 11.92,49.05 13.08,49.05 14.63,50.6 17.35,50.6 18.23,51.48 JP1.5
PGED  (via drill 0.2)
  Top 0.25: IC6.14 v9.35,45.45
  Route2 0.25: JP1.4 17.8,54.38 17.8,51.68 17.15,51.03 14.45,51.03 12.9,49.48 11.75,49.48 9.35,47.08 v9.35,45.45
PGND  (via drill 0.2, 0.35, 0.5, 0.7, 3.2 pad 5.2)
  Top 0.8: v27.05,39.4 C28.1
  other vias: 55.05,34 55.05,32.8 56.25,32.8 56.25,34 57.45,34 57.45,32.8 57.45,31.6 58.65,31.6 58.65,32.8 58.65,34 59.85,34 59.85,32.8 59.85,31.6 62.25,31.6 61.05,31.6 61.05,32.8 61.05,34 62.25,34 62.25,32.8 63.45,31.6 63.45,32.8 63.45,34 55.1,16.95 55.1,15.75 56.3,15.75 56.3,16.95 57.5,16.95 57.5,15.75 57.5,14.55 58.7,14.55 58.7,15.75 58.7,16.95 59.9,16.95 59.9,15.75 59.9,14.55 62.3,14.55 61.1,14.55 61.1,15.75 61.1,16.95 62.3,16.95 62.3,15.75 63.5,14.55 63.5,15.75 63.5,16.95 3,3 0.9,3 1.52,1.52 3,0.9 4.48,1.52 5.1,3 4.48,4.48 3,5.1 1.52,4.48 77,3 74.9,3 75.52,1.52 77,0.9 78.48,1.52 79.1,3 78.48,4.48 77,5.1 75.52,4.48 19.8,18.95 19.8,17.75 21,17.75 21,18.95 22.2,18.95 22.2,17.75 29.45,17 25.55,42.4 53.73,40.6 58.23,40.6 1.2,28.7 56.27,37.2 60.77,37.15 68,34.5 78,34.5 76.5,24 79,19.5 76.5,15 79,10.5 73,34.5 33.1,37.35 26.3,35.95 5.7,26.95
  pour Top (no thermals): 63.95,30.9 63.95,34.3 63.7,34.55 54.5,34.55 54.5,32.6 54.8,32.3 55.3,32.3 56.7,30.9
  pour Top (no thermals): 64,13.85 64,17.2 63.7,17.5 54.55,17.5 54.55,15.55 54.85,15.25 55.35,15.25 56.75,13.85
  pour Bottom (rank 6, no thermals): -0.5,29.5 20.5,29.5 23,32 23,41 25,43 72.5,43 75.5,40 80.5,40 80.5,-0.5 -0.5,-0.5
  pour Route15 (rank 6, no thermals): -1,29.5 -1,-1 81,-1 81,40 75.5,40 72.5,43 25,43 23,41 23,32 20.5,29.5
  pour Route2 (rank 6, no thermals): -1.5,29.5 -1.5,-1.5 81.5,-1.5 81.5,40 75.5,40 72.5,43 25,43 23,41 23,32 20.5,29.5
  pour Top (no thermals): -2,10.5 9,10.5 12.5,7 16,7 17.3,5.67 17.3,-2 -2,-2
  pour Top (rank 6, no thermals): 23,41 23,31 23.65,30.35 29.35,30.35 30.5,31.5 35.5,31.5 38.5,34.5 40.5,34.5 41,35 47,35 48.5,33.5 49.5,33.5 51.5,35.5 65.5,35.5 66.5,34.5 66.5,29.5 68,28 73,28 74.5,26.5 74.5,1.5 78,-2 82,-2 82,40 75.5,40 72.5,43 25,43
  pour Top (rank 2, no thermals): 19.1,19.45 19.1,17.25 22.95,17.25 22.95,19.45
PWM1_HIGH  (via drill 0.2)
  Top 0.25: IC6.40 v18.6,41.95
  Route15 0.25: v18.6,41.95 19.9,41.95 21.3,43.35 21.3,46.55 25.25,50.5 48.04,50.5 R8.1
  other vias: 50.07,48.5
PWM1_LOW
  Top 0.25: IC6.41 20.4,42.45 21.3,43.35 21.3,46.55 25.25,50.5 57.05,50.5 R7.1
PWM2_HIGH  (via drill 0.2)
  Top 0.25: IC6.38 v18.6,40.95
  Route15 0.25: v18.6,40.95 19.55,40.95 21.73,43.13 21.73,46.33 25.4,50 44.07,50 R5.1
  other vias: 45.57,48.5
PWM2_LOW
  Top 0.25: IC6.39 20.05,41.45 21.73,43.13 21.73,46.32 25.4,50 53.07,50 R6.1
ROTA1  (via drill 0.2)
  Top 0.25: IC6.31 v14.3,38.75
  Route2 0.25: S2.1 25,48.65 23.75,47.4 R21.1
  Route15 0.25: v14.3,38.75 14.3,39.28 16.72,41.7 16.72,46.03 18.32,47.62 18.32,50.19 25,56.88 S2.1
  other vias: 23.75,46.9
ROTA2  (via drill 0.2)
  Top 0.25: IC6.32 v14.8,38.45
  Route2 0.25: R20.1 25.25,47.4 26.5,48.65 26.5,56.46 S2.2
  Route15 0.25: v14.8,38.45 14.8,39.18 17.15,41.52 17.15,45.85 18.74,47.45 18.74,50.01 22.23,53.5 24.5,53.5 27.54,56.54 S2.2
  other vias: 25.25,46.9
ROTA4  (via drill 0.2)
  Top 0.25: IC6.34 v15.8,38.45
  Route2 0.25: R19.1 26.75,47.4 30.08,50.73 S2.3
  Route15 0.25: v15.8,38.45 15.8,39.55 17.57,41.32 17.57,45.68 19.17,47.27 19.17,49.84 22.33,53 27.5,53 30.08,55.58 S2.3
  other vias: 26.75,46.9
ROTA8  (via drill 0.2)
  Top 0.25: IC6.36 v16.8,38.45
  Route2 0.25: R18.1 28.25,47.4 32.62,51.77 S2.4
  Route15 0.25: v16.8,38.45 16.8,39.9 18,41.1 18,45.5 19.59,47.09 19.59,49.66 22.43,52.5 29,52.5 32.62,56.12 S2.4
  other vias: 28.25,46.9
VDD  (via drill 0.5, 0.7)
  Top 0.25: D16.C v42.45,40.15 | D17.C v42.45,36.7
  Top 0.5: IC12.1 v35.38,41.45 | IC11.1 v28.58,39.95
  Route2 1: v31.38,30.1 28.58,32.9 v28.58,39.95 30.08,41.45 v35.38,41.45 41.15,41.45 v42.45,40.15 v42.45,36.7
  other vias: 37.8,20.25 37.8,21.45 37.8,22.65 37.8,23.85 37.8,25.05 39,25.05 39,23.85 39,22.65 39,21.45 39,20.25 40.2,20.25 40.2,21.45 40.2,22.65 40.2,23.85 40.2,25.05 41.4,25.05 41.4,23.85 41.4,22.65 41.4,21.45 41.4,20.25 37.8,3.2 37.8,4.4 37.8,5.6 37.8,6.8 37.8,8 39,8 39,6.8 39,5.6 39,4.4 39,3.2 40.2,3.2 40.2,4.4 40.2,5.6 40.2,6.8 40.2,8 41.4,8 41.4,6.8 41.4,5.6 41.4,4.4 41.4,3.2 36.6,23.85 36.6,22.65 36.6,21.45 36.6,6.8 36.6,5.6 36.6,4.4
  pour Top (rank 6, no thermals): 17.9,29.5 17.9,-2 42,-2 42,11 35.8,11 35.5,11.3 35.5,13.9 38.85,17.25 42,17.25 42,28.05 35.8,28.05 35.5,28.35 35.5,30.65 31.15,30.65 30,29.5
  pour Bottom (no thermals): 42,8.5 37.55,8.5 36.05,7 36.05,4.2 37.55,2.7 42,2.7
  pour Bottom (no thermals): 42,25.55 37.55,25.55 36.05,24.05 36.05,21.25 37.55,19.75 42,19.75
X  (via drill 0.2)
  Top 0.25: IC6.45 v18.8,44.45
  Route15 0.25: v18.8,44.45 20.45,46.1 20.45,49.31 22.64,51.5 70,51.5 J1.4
(copper drawn outside any net)
  shapes: Top area x4

## Text on the board
tPlace: Designed by @Meta_for_Life | In collab with @Kanade___1214 | MCLR | RBCN-MD-X3 | v3.2.6-Γ.3 | CAN_ID | RESET | CAN | ENCODER | THERMISTOR | VIN+ | VIN- | MOTOR
bPlace: TMCITS_RoboconProject | B | VCC | 5V | CANH | CANL | A | GND | X | GND
bNames: D:/downloads/7.ECAD/2.基板用bmp/white.bmp | Aber das ist erst der Anfang.